# EAGLE board Li-boost (EAGLE 4.13)
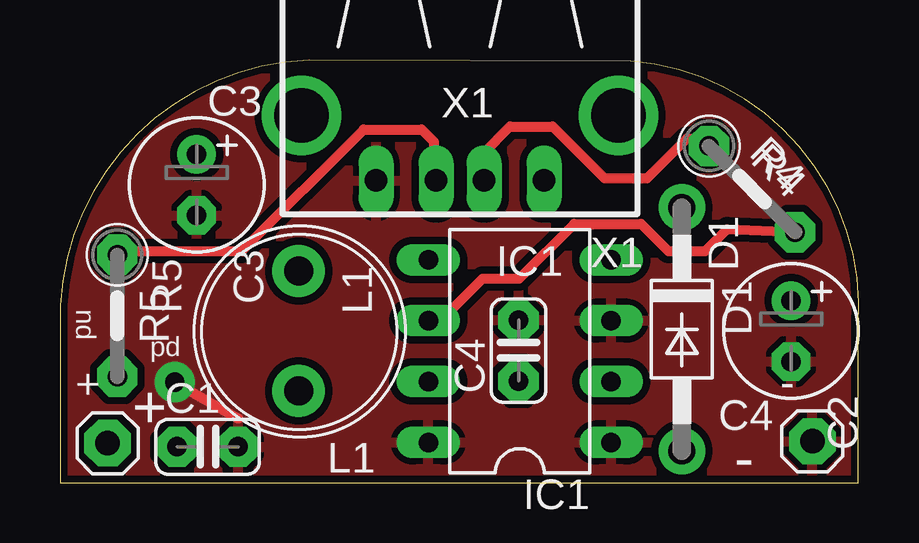
[diagram p0: board, top side]
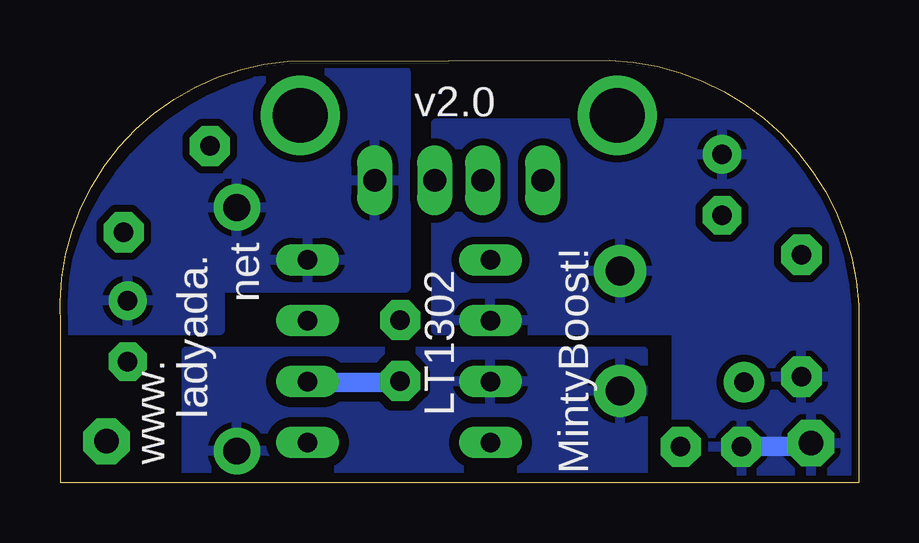
[diagram p1: board, bottom side, seen from below]

Size 33.28 x 17.63 mm. Coordinates in mm from the lower left corner, seen from the top.
Outline: 0,0 0,6.42 arc-90 10.38,17.63 23.79,17.58 arc-90 33.25,6.52 33.25,0
Outline: 0,0 33.25,0
Copper layers (1*16): Top 0.035mm / dielectric 1.5mm / Bottom 0.035mm
Design rules "default": minimum track width 12mil, minimum drill 20mil, track to track 12mil, track to pad 12mil, pad to pad 12mil, via to via 12mil, smd to smd 0mil, copper to edge 10mil, drill to drill 8mil, minimum pad ring 10mil, minimum via ring 8mil, stop-mask expansion 4mil, vias tented up to drill 0mil, thermal gap 10mil

## Footprints (pad centres in the part's own frame; a part is rotated, then mirrored left to right if it is on the bottom)
1X01 = drill 1.016 pad 1.93 octagon: 1 0,0
C025-024X044 = drill 0.813 pad 1.676 octagon: 1 -1.27,0; 2 1.27,0
E2,5-6 = drill 0.813 pad 1.6 round: + -1.27,0 | drill 0.813 pad 1.6 octagon: - 1.27,0
DO41-10 = drill 1.118 pad 1.93 round: A 5.08,0; C -5.08,0
DIL08 = drill 0.813 long: 1 -3.81,-3.81; 2 -1.27,-3.81; 3 1.27,-3.81; 4 3.81,-3.81; 5 3.81,3.81; 6 1.27,3.81; 7 -1.27,3.81; 8 -3.81,3.81
6000 = drill 1.2 pad 2.184 round: 1 -2.5,0; 2 2.5,0
0207/5V = drill 0.813 pad 1.676 octagon: 1 -2.54,0; 2 2.54,0
PN87520 = drill 0.95 long: 1 -3.5,2.71; 2 -1,2.71; 3 1,2.71; 4 3.5,2.71 | drill 2.286 round: P$1 -6.604,0; P$2 6.604,0

## Placement (x,y rotation side)
+  [1X01]  1.99,1.65 0 top
-  [1X01]  31.35,1.73 0 top
C1  0.1uF  [C025-024X044]  6.15,1.5 0 top
C2  220uF  [E2,5-6]  30.46,6.33 270 top
C3  220uF  [E2,5-6]  5.69,12.42 270 top
C4  0.1uF  [C025-024X044]  19.11,5.51 90 top
D1  1N5817  [DO41-10]  25.91,6.4 270 top
IC1  LT1302  [DIL08]  19.16,5.49 90 top
L1  22uH  [6000]  9.95,6.33 270 top
R4  15K  [0207/5V]  28.83,12.25 315 top
R5  15K  [0207/5V]  2.39,6.96 270 top
X1  [PN87520]  16.67,15.32 180 top

## Library data of the parts
+ - = pinhead-ez
C1-C4 R4 R5 = rcl-ez
D1 IC1 L1 = usbbuck
X1 = con-berg

## Nets
+5V: C2.+ D1.C IC1.4 X1.1
BATT+: +.1 C1.1 C3.+ IC1.6 L1.1 R4.2 R5.2
D+: R5.1 X1.3
D-: R4.1 X1.2
GND: -.1 C1.2 C2.- C3.- C4.2 IC1.1 IC1.3 IC1.8 X1.4
N$1: C4.1 IC1.2
N$5: D1.A IC1.7 L1.2

## Tracks (layer width: path | path; a pad name or v marks a point on that pad's centre or on a via)
+5V
  Bottom 0.813: D1.C 26.22,11.43
  pour Bottom (isolate 0.305): 18.88,17.15 18.88,8.13 26.62,8.13 26.62,6.35 32.97,6.35 arc90 22.18,17.15
BATT+
  Top 0.406: R4.2 27.8,10.58 26.88,9.65 25.35,9.65 24.21,10.8 21.42,10.8 19.13,8.51 17.61,8.51 15.96,6.86 15.24,6.86 | 15.24,6.86 15.07,6.86 | 15.24,6.86 IC1.6
  Bottom 0.813: 4.91,1.53 5.03,1.53 | 4.91,1.53 C1.1 | +.1 2.11,1.53 4.91,1.53
  pour Bottom (isolate 0.305): 7.57,0.38 7.57,6.35 17.61,6.35 17.61,14.99 4.27,14.99 arc90 0.21,6.99 0.21,0.13 arc-90 0.33,0.26 7.45,0.26 arc90
D+
  Top 0.406: R5.1 2.54,9.65 7.57,9.65 12.65,14.73 15.07,14.73 15.57,14.23 15.57,12.58 15.63,12.58 X1.3
D-
  Top 0.406: X1.2 17.67,13.78 18.75,14.86 20.53,14.86 22.69,12.7 24.46,12.7 26.12,14.35 27,14.35 27.2,14.55 R4.1
GND  (via drill 0.8 pad 1.68)
  Top 0.406: 7.45,1.4 7.45,1.48 C1.2 | v4.78,4.19 7.45,2.67
  pour Top (isolate 0.305): -0.17,-0.25 -0.17,8.13 arc-90 9.1,17.78 23.07,17.78 arc-90 33.61,7.24 33.61,-0.25
N$1
  Bottom 0.813: 22.99,4.19 23.45,4.19 | 22.99,4.19 IC1.2 | C4.1 19.41,4.19 22.99,4.19
N$5
  pour Bottom (isolate 0.406): 8.97,5.46 28.02,5.46 28.02,0.13 8.97,0.13

## Text on the board
tPlace: C3 | X1 | R4 | IC1 | R5 | D1 | pu | pd | + | L1 | C4 | -
bPlace: v2.0 | net | LT1302 | ladyada. | MintyBoost! | www.